# Altium PCB PCB1_1.pcbdoc
Units mil, origin at the board's own origin, x right, y up, seen from the top; angles counter-clockwise.
Board outline 4709 x 4709 mil, 2 copper layers (Top Layer, Bottom Layer); 27 components, 27 nets, 162 pads, 58 vias.
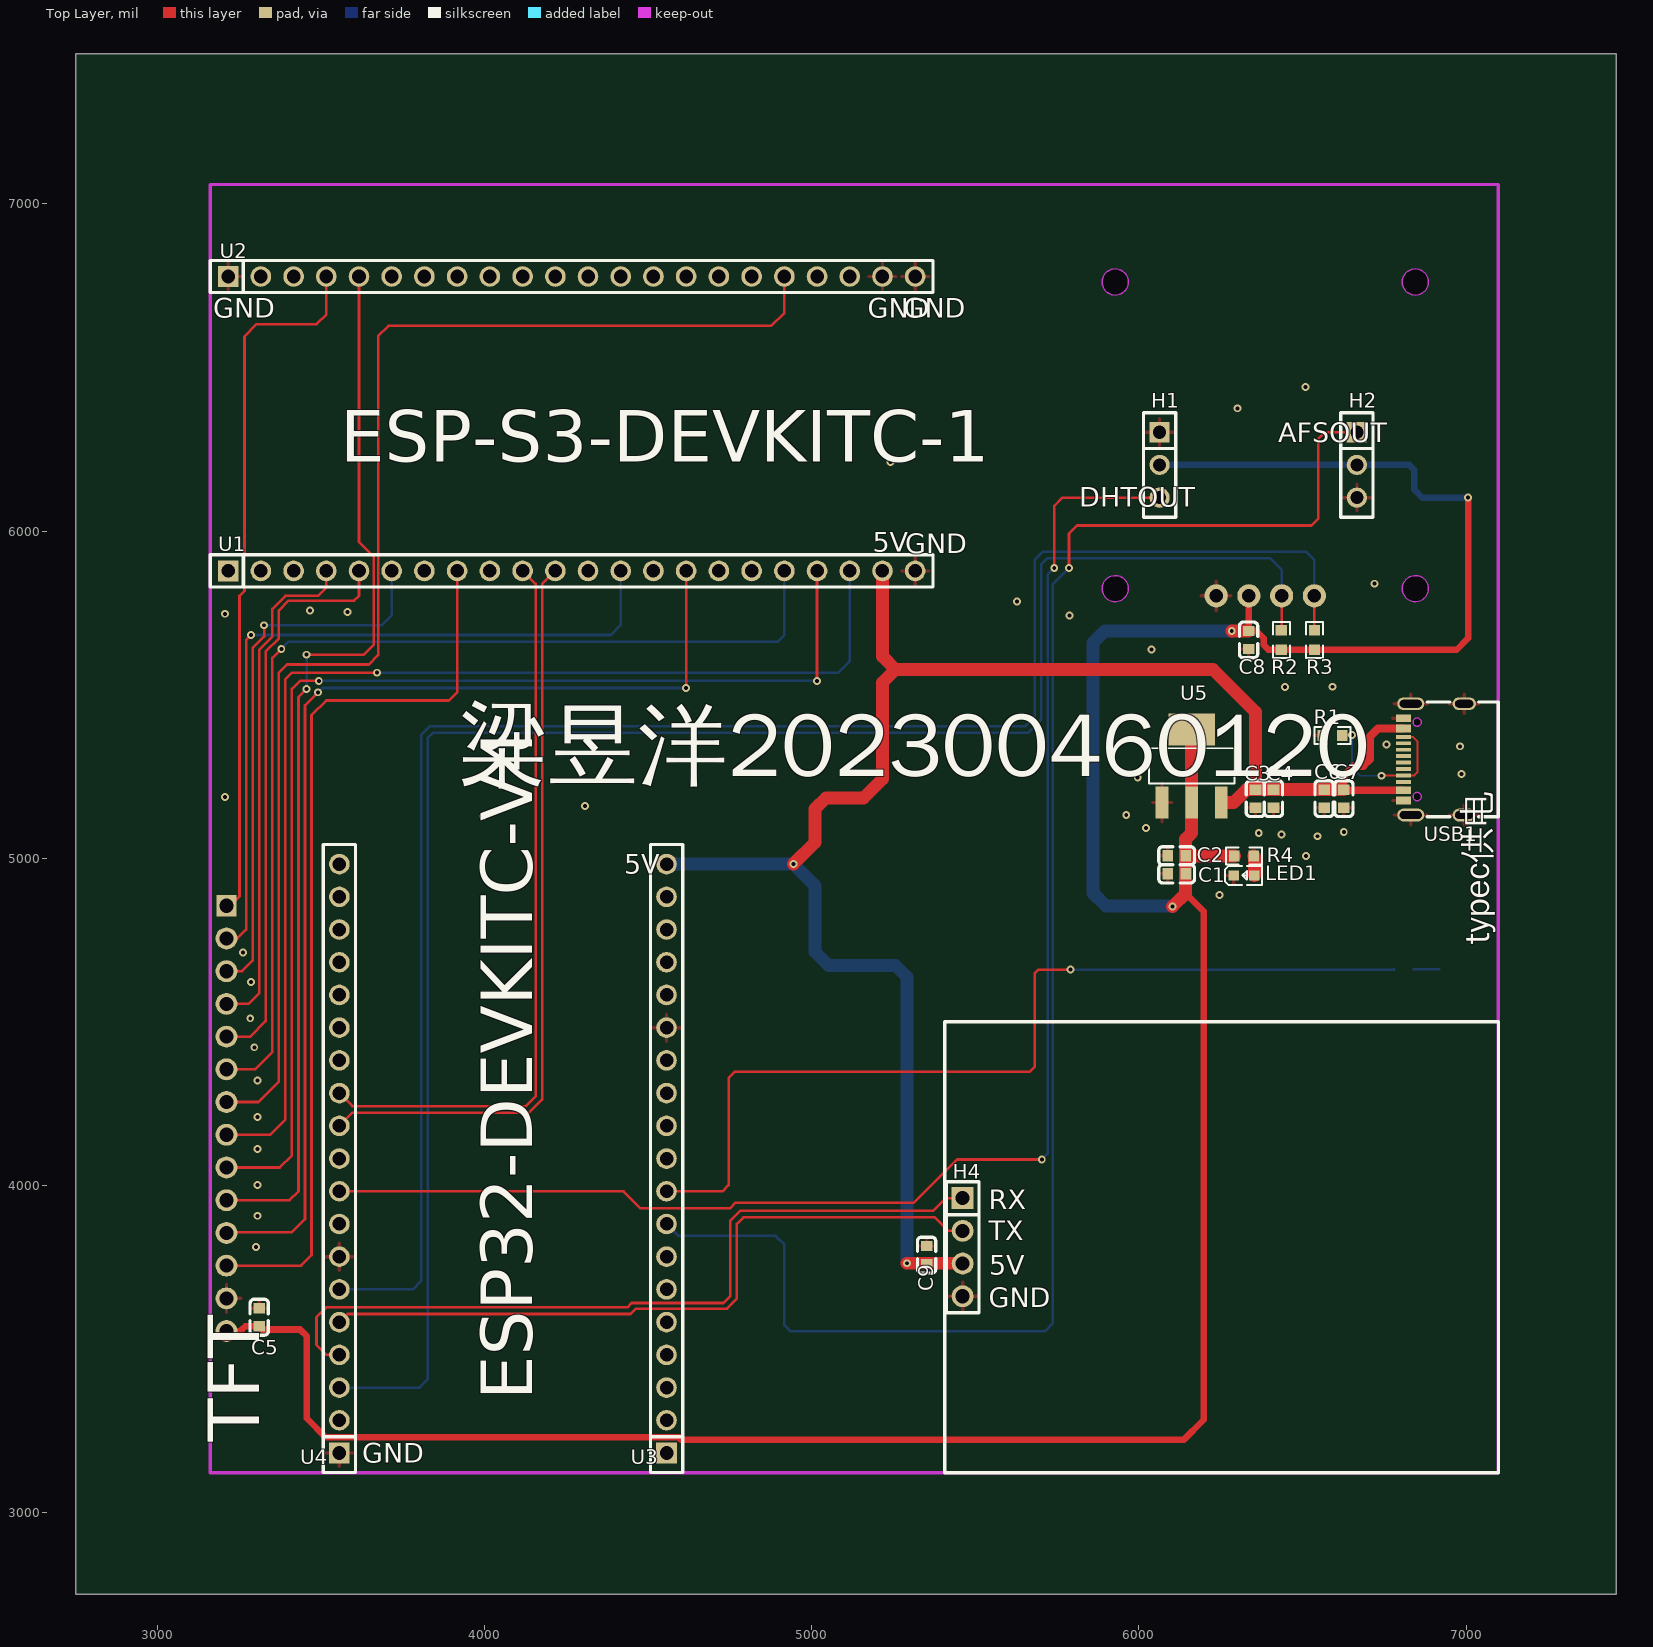
[diagram p0: Top Layer view]
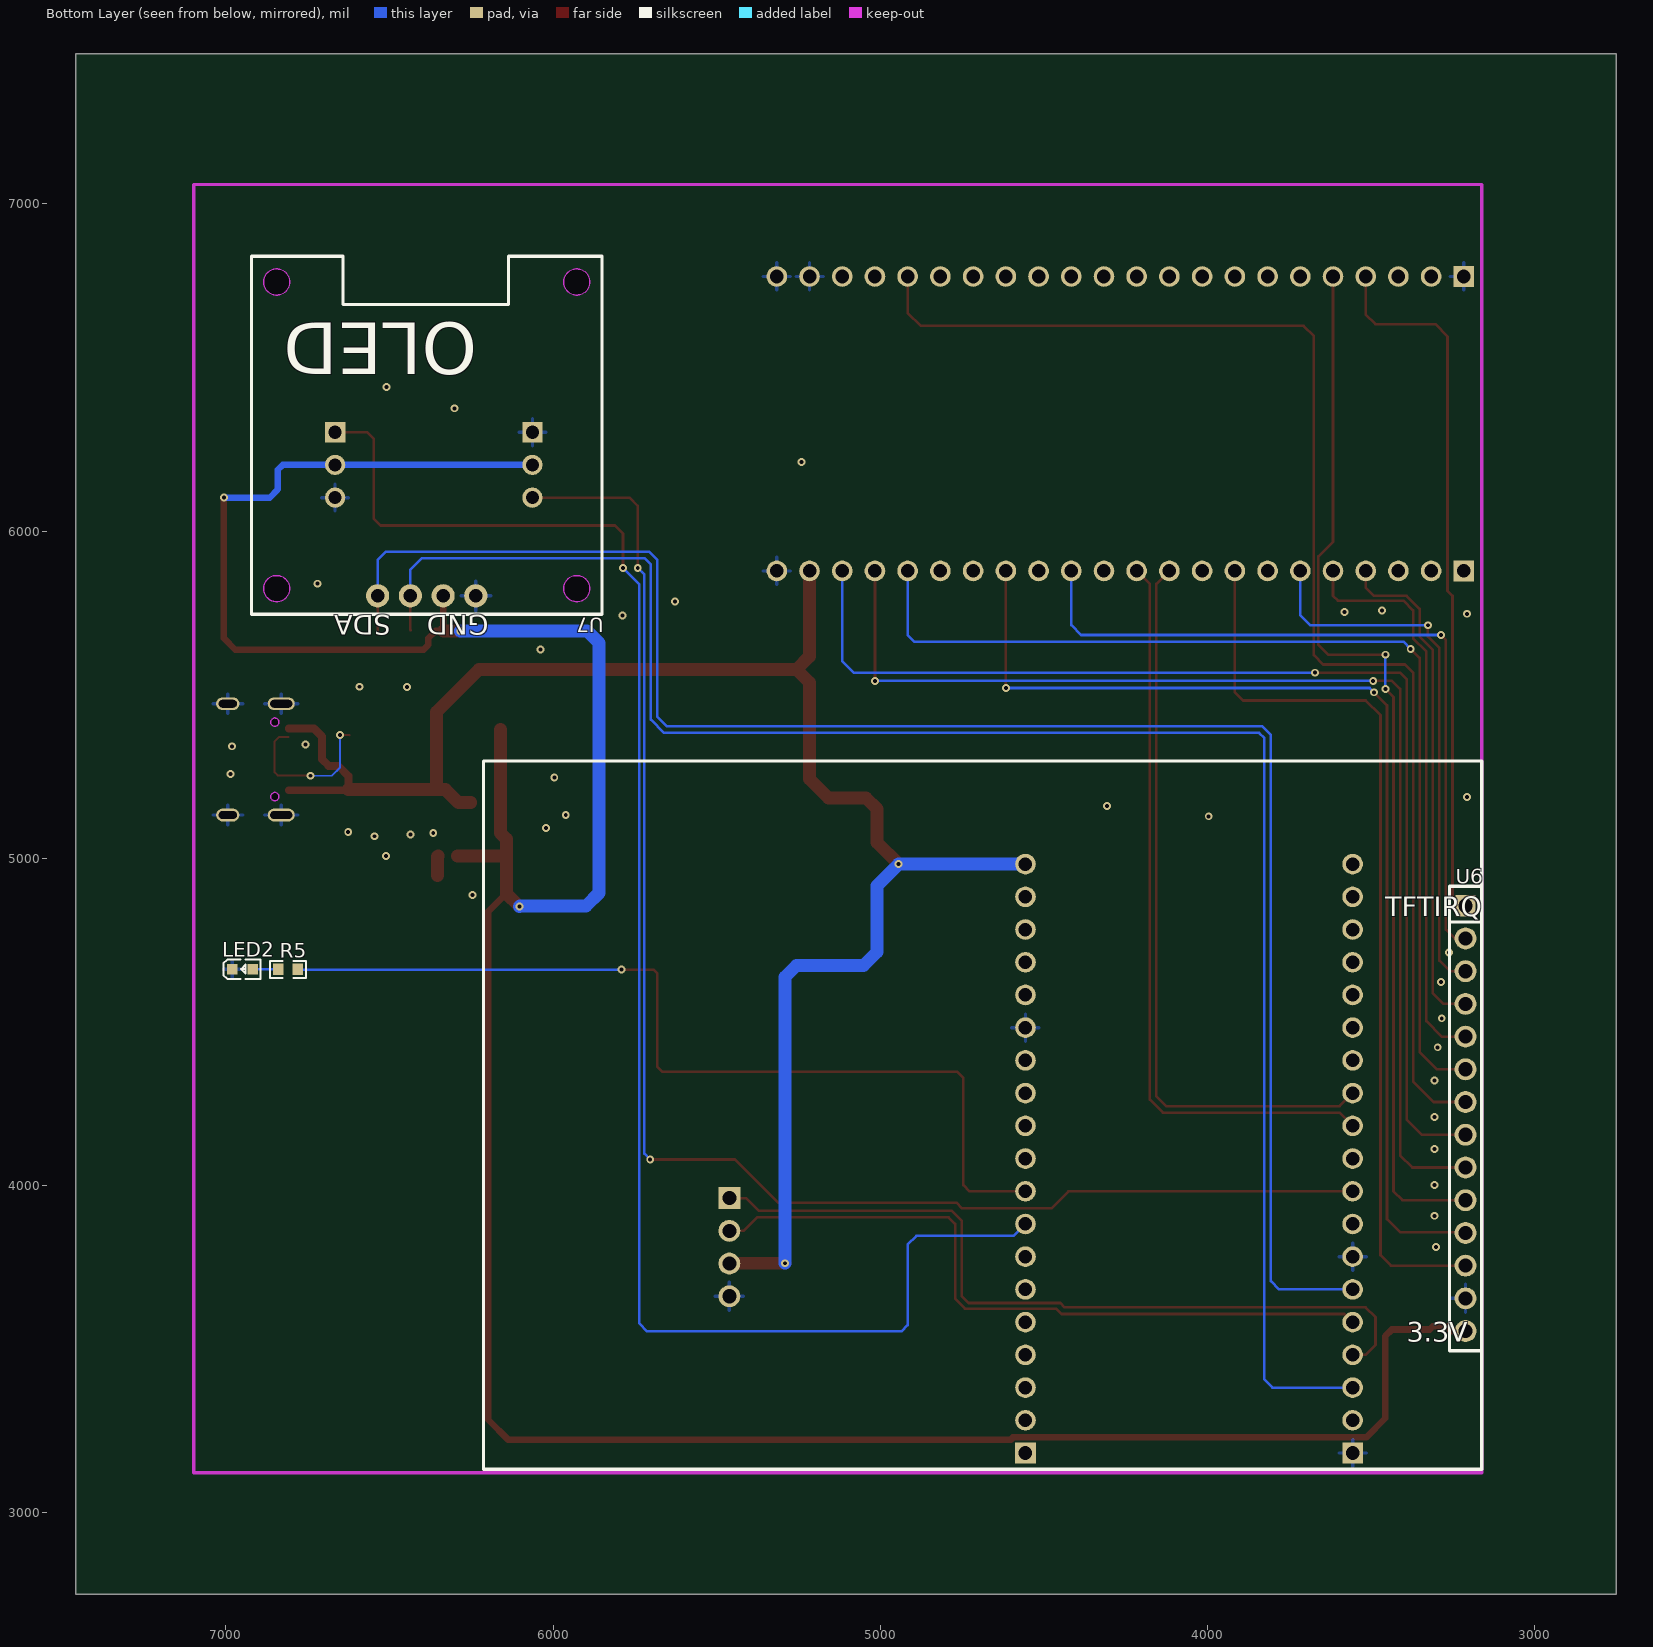
[diagram p1: Bottom Layer view, seen from below]

## Layer stack, top to bottom
Top Layer: signal copper (thickness not stored)
Dielectric: dielectric 12.6, FR-4, Dk 4.8
Bottom Layer: signal copper (thickness not stored)

## Board outline
7459,2750 2750,2750 2750,7459 7459,7459

## Design rules (kind name [scope] priority, off if disabled: settings)
BoardOutlineClearance copperThickness1oz [All] p0: genericclearance=10 ignorepadtopadclearanceinfootprint=FALSE except(0: Arc-SplitContinuation Track-SplitContinuation SMDPad-SplitContinuation THPad-SplitContinuation Via-SplitContinuation Fill-SplitContinuation Poly-SplitContinuation Region-SplitContinuation Text-SplitContinuation; 6: Track-CutoutEdge SMDPad-CutoutEdge THPad-CutoutEdge Via-CutoutEdge Region-CutoutEdge; 11.8: Track-OutlineEdge SMDPad-OutlineEdge THPad-OutlineEdge Via-OutlineEdge Fill-OutlineEdge Region-OutlineEdge Poly-OutlineEdge Text-OutlineEdge Fill-CutoutEdge)
BoardOutlineClearance copperThickness2oz [All] p0: genericclearance=10 ignorepadtopadclearanceinfootprint=FALSE except(0: Arc-SplitContinuation Track-SplitContinuation SMDPad-SplitContinuation THPad-SplitContinuation Via-SplitContinuation Fill-SplitContinuation Poly-SplitContinuation Region-SplitContinuation Text-SplitContinuation; 6: Track-CutoutEdge SMDPad-CutoutEdge THPad-CutoutEdge Via-CutoutEdge Region-CutoutEdge; 11.8: Track-OutlineEdge SMDPad-OutlineEdge THPad-OutlineEdge Via-OutlineEdge Fill-OutlineEdge Region-OutlineEdge Poly-OutlineEdge Text-OutlineEdge Fill-CutoutEdge)
Clearance copperThickness1oz [(InNet('GND') OR InNet('3.3V') OR InNet('5V') OR InNet('RX') OR InNet('TX') OR InNet('DHTOUT') OR InNet('AFSOUT') OR InNet('CC') OR InNet('OLEDSDA') OR InNet('OLEDSCL') OR InNet('RX2') OR InNet('TX2') OR InNet('TFFTCS') OR InNet('TFFTCLK') OR InNet('TFTDIN') OR InNet('TFTCS') OR InNet('TFTD0') OR InNet('TFTRST') OR InNet('TFTMISO') OR InNet('TFTMOSI') OR InNet('TFTSCK') OR InNet('TFTIRQ') OR InNet('TFTDC') OR InNet('TFTLED') OR InNet('$1N2999') OR InNet('LED') OR InNet('$1N4042'))] p1: gap=7 ignorepadtopadclearanceinfootprint=FALSE except(4: Track-Track; 6: Track-SMDPad SMDPad-SMDPad Track-THPad SMDPad-THPad THPad-THPad Track-Via SMDPad-Via THPad-Via Via-Via SMDPad-Fill THPad-Fill Via-Fill Fill-Fill Track-Region SMDPad-Region THPad-Region Via-Region Region-Region Track-Poly SMDPad-Poly THPad-Poly Via-Poly Fill-Poly Region-Poly Poly-Poly Track-Text SMDPad-Text THPad-Text Via-Text Fill-Text Region-Text Poly-Text Text-Text; 6.9: Track-Hole SMDPad-Hole THPad-Hole Via-Hole Fill-Hole Region-Hole Poly-Hole Text-Hole Sheet-Hole; 11.8: Track-Fill Fill-Region Track-Sheet SMDPad-Sheet THPad-Sheet Via-Sheet Fill-Sheet Region-Sheet Poly-Sheet Text-Sheet)
Clearance copperThickness2oz [All] p1: gap=7 ignorepadtopadclearanceinfootprint=FALSE except(6: Track-SMDPad SMDPad-SMDPad Track-THPad SMDPad-THPad THPad-THPad Track-Via SMDPad-Via THPad-Via Via-Via SMDPad-Fill THPad-Fill Via-Fill Fill-Fill Track-Region SMDPad-Region THPad-Region Via-Region Region-Region Track-Poly SMDPad-Poly THPad-Poly Via-Poly Fill-Poly Region-Poly Poly-Poly Track-Text SMDPad-Text THPad-Text Via-Text Fill-Text Region-Text Poly-Text Text-Text; 6.9: Track-Hole SMDPad-Hole THPad-Hole Via-Hole Fill-Hole Region-Hole Poly-Hole Text-Hole Sheet-Hole; 8: Track-Track; 11.8: Track-Fill Fill-Region Track-Sheet SMDPad-Sheet THPad-Sheet Via-Sheet Fill-Sheet Region-Sheet Poly-Sheet Text-Sheet)
DiffPairsRouting differentialPair [All] p1: maxuncoupledlength=10 minlimit=6 maxlimit=6 mostfreqgap=6 toplayer_minwidth=5 toplayer_prefwidth=10 toplayer_maxwidth=100 bottomlayer_minwidth=5 bottomlayer_prefwidth=10 bottomlayer_maxwidth=100
PasteMaskExpansion pasteMaskExpansion [All] p1: expansion=0
PlaneConnect innerPlane [All] p1: planeconnectstyle=Relief reliefexpansion=20 reliefentries=4 reliefconductorwidth=10 reliefairgap=10
PolygonConnect copperRegion [All] p1: connectstyle=Relief reliefentries=4 reliefconductorwidth=10 polygonreliefangle="90 Angle" airgapwidth=10
RoutingVias viaSize [All] p1: viastyle="Through Hole" holewidth=12.0078 minholewidth=11.811 maxholewidth=248.0314 width=24.0158 minwidth=19.685 maxwidth=393.7008
SolderMaskExpansion solderMaskExpansion [All] p1: useseparateexpansions=TRUE expansion=2 expansionbottom=2
Width copperThickness1oz [All] p1: maxlimit=100 minlimit=5 preferedwidth=10
Width copperThickness2oz [All] p1: maxlimit=100 minlimit=8 preferedwidth=10

## Components (designator, comment, footprint, x,y, rotation, side; value= is the part's Value field where it differs from the comment)
C1 "CL10A106KP8NNNC" C0603 6115.11,4952.19 r180 top
C2 "CC0603KRX7R9BB104" C0603 6115.11,5007.19 r180 top
C3 "CL10A106KP8NNNC" C0603 6356,5182 r90 top
C4 "CC0603KRX7R9BB104" C0603 6411,5182 r90 top
C5 "CC0603KRX7R9BB104" C0603 3311,3597 r270 top
C6 "CL10A106KP8NNNC" C0603 6566,5182 r90 top
C7 "CL10A106KP8NNNC" C0603 6626,5182 r90 top
C8 "CC0603KRX7R9BB104" C0603 6334.95,5667 r90 top
C9 "CC0603KRX7R9BB104" C0603 5351,3787 r270 top
H1 "PM254V-11-03-H85" HDR-TH_3P-P2.54-V-F 6063,6202 r270 top
H2 "PM254V-11-03-H85" HDR-TH_3P-P2.54-V-F 6666,6202 r270 top
H4 "PZ254V-11-04P" HDR-TH_4P-P2.54-V-M 5461,3810.98 r270 top
LED1 "KT-0603R" LED0603-RD 6321,4947 r0 top
LED2 "KT-0603R" LED0603-RD 6948.87,4660.41 r180 bottom
R1 "FRC0603F5101TS" R0603 6591.57,5375.53 r0 top
R2 "0603WAF4701T5E" R0603 6434.95,5667 r270 top
R3 "0603WAF4701T5E" R0603 6536,5667 r270 top
R4 "0603WAF4701T5E" R0603 6321,5007 r180 top
R5 "0603WAF1001T5E" R0603 6810.05,4660.41 r0 bottom
U1 "ZX-PM2.54-1-22PY" HDR-TH_22P-P2.54-V-F 4266,5877.91 r0 top
U2 "ZX-PM2.54-1-22PY" HDR-TH_22P-P2.54-V-F 4266,6777.91 r0 top
U3 "ZX-PM2.54-1-19PY" HDR-TH_19P-P2.54-V-F 4555.96,4082 r90 top
U4 "ZX-PM2.54-1-19PY" HDR-TH_19P-P2.54-V-F 3555.96,4082 r90 top
U5 "AMS1117-3.3_C347222" SOT-223-4_L6.5-W3.5-P2.30-LS7.0-BR 6161,5282 r270 top
U6 "PM254-1-14-Z-8.5" HDR-TH_14P-P2.54-V-F-1 3211,4204.68 r270 bottom
U7 "HS96L03W2C03" OLED-TH_L27.8-W27.2-P2.54_C9900033791 6386,5802 r0 bottom
USB1 "TYPE-C16PIN" USB-C-SMD_TYPE-C16PIN 6901,5302 r90 top

## Footprints (in the part's own frame and the unit in brackets; to place one, negate y for a bottom-side part, rotate by r counter-clockwise, add the part's x,y. Pads: shape width x height; smd on the part's side, far side on the other; paste and mask are expansions set on the pad)
C0603 [mm]
  rect 0.8x0.9 smd: 1(-0.7,0) 2(0.7,0)
  silkscreen extent -1.39,-0.71 1.39,0.71
HDR-TH_3P-P2.54-V-F [mil]
  rect 62x62 hole 40.16: 1(-100,0)
  round 62 hole 40.16: 2(0,0) 3(100,0)
  silkscreen extent -160,-49 160,49
HDR-TH_4P-P2.54-V-M [mm]
  rect 1.7x1.7 hole 1.1: 1(-3.81,0)
  round 1.7 hole 1.1: 2(-1.27,0) 3(1.27,0) 4(3.81,0)
  silkscreen extent -5.08,-1.27 5.08,1.27
HDR-TH_14P-P2.54-V-F-1 [mm]
  rect 1.7x1.575 hole 1.1: 1(-16.51,0)
  round 1.7 hole 1.1: 2(-13.97,0) 3(-11.43,0) 4(-8.89,0) 5(-6.35,0) 6(-3.81,0) 7(-1.27,0) 8(1.27,0) 9(3.81,0) 10(6.35,0) 11(8.89,0) 12(11.43,0) 13(13.97,0) 14(16.51,0)
  silkscreen extent -18.03,-1.25 18.03,1.25
HDR-TH_19P-P2.54-V-F [mm]
  rect 1.6x1.6 hole 1.05: 1(-22.86,0)
  round 1.6 hole 1.05: 2(-20.32,0) 3(-17.78,0) 4(-15.24,0) 5(-12.7,0) 6(-10.16,0) 7(-7.62,0) 8(-5.08,0) 9(-2.54,0) 10(0,0) 11(2.54,0) 12(5.08,0) 13(7.62,0) 14(10.16,0) 15(12.7,0) 16(15.24,0) 17(17.78,0) 18(20.32,0) 19(22.86,0)
  silkscreen extent -24.38,-1.25 24.38,1.25
HDR-TH_22P-P2.54-V-F [mm]
  rect 1.6x1.6 hole 1.05: 1(-26.67,0)
  round 1.6 hole 1.05: 2(-24.13,0) 3(-21.59,0) 4(-19.05,0) 5(-16.51,0) 6(-13.97,0) 7(-11.43,0) 8(-8.89,0) 9(-6.35,0) 10(-3.81,0) 11(-1.27,0) 12(1.27,0) 13(3.81,0) 14(6.35,0) 15(8.89,0) 16(11.43,0) 17(13.97,0) 18(16.51,0) 19(19.05,0) 20(21.59,0) 21(24.13,0) 22(26.67,0)
  silkscreen extent -28.06,-1.25 28.06,1.25
LED0603-RD [mm]
  rect 0.8x0.8 smd: 1(-0.799,0) 2(0.799,0)
  silkscreen extent -1.49,-0.75 1.39,0.76
OLED-TH_L27.8-W27.2-P2.54_C9900033791 [mm]
  round 1.8 hole 1.05: 1(-3.81,0) 2(-1.27,0) 3(1.27,0) 4(3.81,0)
  Board Outline Layer circle w0.005: c-11.65,-0.56 r1.016
  Board Outline Layer circle w0.005: c11.65,-0.56 r1.016
  Board Outline Layer circle w0.005: c-11.65,-24.36 r1.016
  Board Outline Layer circle w0.005: c11.65,-24.36 r1.016
  Board Outline Layer region: -10.634,-0.56 -10.735,-0.119 -11.016,0.234 -11.424,0.431 -11.876,0.431 -12.283,0.234 -12.565,-0.119 -12.666,-0.56 -12.666,-0.56 -12.565,-1.001 -12.283,-1.354 -11.876,-1.551 -11.424,-1.551 -11.016,-1.354 -10.735,-1.001 -10.634,-0.56
  Board Outline Layer region: 12.666,-0.56 12.565,-0.119 12.283,0.234 11.876,0.431 11.424,0.431 11.017,0.234 10.735,-0.119 10.634,-0.56 10.634,-0.56 10.735,-1.001 11.017,-1.354 11.424,-1.551 11.876,-1.551 12.283,-1.354 12.565,-1.001 12.666,-0.56
  Board Outline Layer region: -10.634,-24.36 -10.735,-23.919 -11.016,-23.566 -11.424,-23.369 -11.876,-23.369 -12.283,-23.566 -12.565,-23.919 -12.666,-24.36 -12.666,-24.36 -12.565,-24.801 -12.283,-25.154 -11.876,-25.35 -11.424,-25.35 -11.016,-25.154 -10.735,-24.801 -10.634,-24.36
  Board Outline Layer region: 12.666,-24.36 12.565,-23.919 12.283,-23.566 11.876,-23.369 11.424,-23.369 11.017,-23.566 10.735,-23.919 10.634,-24.36 10.634,-24.36 10.735,-24.801 11.017,-25.154 11.424,-25.35 11.876,-25.35 12.283,-25.154 12.565,-24.801 12.666,-24.36
  Multi-Layer board cut-out: -10.634,-0.56 -10.735,-0.119 -11.016,0.234 -11.424,0.431 -11.876,0.431 -12.283,0.234 -12.565,-0.119 -12.666,-0.56 -12.666,-0.56 -12.565,-1.001 -12.283,-1.354 -11.876,-1.551 -11.424,-1.551 -11.016,-1.354 -10.735,-1.001 -10.634,-0.56
  Multi-Layer board cut-out: 12.666,-0.56 12.565,-0.119 12.283,0.234 11.876,0.431 11.424,0.431 11.017,0.234 10.735,-0.119 10.634,-0.56 10.634,-0.56 10.735,-1.001 11.017,-1.354 11.424,-1.551 11.876,-1.551 12.283,-1.354 12.565,-1.001 12.666,-0.56
  Multi-Layer board cut-out: -10.634,-24.36 -10.735,-23.919 -11.016,-23.566 -11.424,-23.369 -11.876,-23.369 -12.283,-23.566 -12.565,-23.919 -12.666,-24.36 -12.666,-24.36 -12.565,-24.801 -12.283,-25.154 -11.876,-25.35 -11.424,-25.35 -11.016,-25.154 -10.735,-24.801 -10.634,-24.36
  Multi-Layer board cut-out: 12.666,-24.36 12.565,-23.919 12.283,-23.566 11.876,-23.369 11.424,-23.369 11.017,-23.566 10.735,-23.919 10.634,-24.36 10.634,-24.36 10.735,-24.801 11.017,-25.154 11.424,-25.35 11.876,-25.35 12.283,-25.154 12.565,-24.801 12.666,-24.36
  silkscreen extent -13.6,-26.36 13.6,1.44
R0603 [mil]
  rect 31.75x34.02 smd: 1(-29.66,0) 2(29.66,0)
  silkscreen extent -55,-26 55,26
SOT-223-4_L6.5-W3.5-P2.30-LS7.0-BR [mm]
  rect 2.47x0.98 smd: 1(2.835,-2.3) 2(2.835,0) 3(2.835,2.3)
  rect 2.47x3.6 smd: 4(-2.835,0)
  silkscreen extent -1.37,-3.33 1.37,3.33
USB-C-SMD_TYPE-C16PIN [mm]
  oval 1x2.1 hole 0.6 slot 1.7 at 90 deg: 1(-4.32,1.787) 2(4.32,1.787)
  oval 1x1.8 hole 0.6 slot 1.4 at 90 deg: 3(-4.32,-2.362) 4(4.32,-2.362)
  rect 0.6x1.15 smd: A1B12(-3.2,2.362) A4B9(-2.4,2.362) B1A12(3.2,2.362) B4A9(2.4,2.362)
  rect 0.3x1.15 smd: A5(-1.25,2.362) A6(-0.25,2.362) A7(0.25,2.362) A8(1.25,2.362) B5(1.75,2.362) B6(0.75,2.362) B7(-0.75,2.362) B8(-1.75,2.362)
  Board Outline Layer circle w0.005: c2.89,1.288 r0.325
  Board Outline Layer circle w0.005: c-2.89,1.288 r0.325
  Board Outline Layer region: 2.89,0.963 2.749,0.995 2.636,1.085 2.573,1.216 2.573,1.36 2.636,1.491 2.749,1.581 2.89,1.613 2.89,1.613 3.031,1.581 3.144,1.491 3.207,1.36 3.207,1.216 3.144,1.085 3.031,0.995 2.89,0.963
  Board Outline Layer region: -2.89,0.963 -3.031,0.995 -3.144,1.085 -3.207,1.216 -3.207,1.36 -3.144,1.491 -3.031,1.581 -2.89,1.613 -2.89,1.613 -2.749,1.581 -2.636,1.491 -2.573,1.36 -2.573,1.216 -2.636,1.085 -2.749,0.995 -2.89,0.963
  Multi-Layer board cut-out: 2.89,0.963 2.749,0.995 2.636,1.085 2.573,1.216 2.573,1.36 2.636,1.491 2.749,1.581 2.89,1.613 2.89,1.613 3.031,1.581 3.144,1.491 3.207,1.36 3.207,1.216 3.144,1.085 3.031,0.995 2.89,0.963
  Multi-Layer board cut-out: -2.89,0.963 -3.031,0.995 -3.144,1.085 -3.207,1.216 -3.207,1.36 -3.144,1.491 -3.031,1.581 -2.89,1.613 -2.89,1.613 -2.749,1.581 -2.636,1.491 -2.573,1.36 -2.573,1.216 -2.636,1.085 -2.749,0.995 -2.89,0.963
  silkscreen extent -4.45,-5 4.45,0.52

## Via types
v1: diameter 24.02, hole 12.01, Top Layer to Bottom Layer, 58 vias

## Nets (pads, with @x,y where several pads share a name; then routed paths per layer and width w, separated by ;. In a path a pad name is that pad's centre, name@x,y a point inside that pad or via, vN(x,y) a via of type N, cw(c..) or ccw(c..) an arc to the next point about the centre after c; other vN are vias at no path point)
3.3V: C1.1 C2.1 C5.2 C8.2 H1.2 H2.2 R2.2 R3.2 R4.2 U5.2 U5.4 U6.14 U7.2 | length 9449.6
  Top Layer w20: U6.14 3253.68,3554.68 3268.44,3569.44 C5.2 3321,3559.44 3436,3559.44 3456,3539.44 3456,3288 3514.52,3229.48 4594.08,3229.48 4601.56,3222 6136,3222 6197.67,3283.67 6197.67,4837 6142.67,4892 ; U7.2 6334.95,5800.95 C8.2 6358.44,5694.56 6381,5672 6381,5652 6395.66,5637.34 R2.2 R3.2 6971.34,5637.34 7006,5672 v1(7006,6102)
  Top Layer w39.37: v1(6102.67,4852) 6142.67,4892 C1.1 C2.1 ; U5.4 U5.2 6161,5077 6142.67,5058.67 C2.1 ; R4.2 6291.15,5007.19 C2.1
  Top Layer w39.4: v1(6283.56,5694.56) C8.2
  Bottom Layer w20: H1.2 H2.2 6826,6202 6841,6187 6841,6127 6866,6102 v1(7006,6102)
  Bottom Layer w39.4: v1(6102.67,4852) 6100.67,4854 5899,4854 5859,4894 5859,5658 5895.56,5694.56 v1(6283.56,5694.56)
5V: C3.2 C4.2 C6.2 C7.2 C9.2 H4.3 U1.21 U3.19 U5.3 USB1.A4B9 USB1.B4A9 | length 5443.9
  Top Layer w23.62: C6.2 C6.2@6568.05,5207.51 ; C7.2@6624.95,5209.56 6624.95,5250.95 6656,5282 6686,5282 6706,5302 6706,5372 6730.49,5396.49 USB1.B4A9 ; C7.2@6626,5207.51 USB1.A4B9
  Top Layer w39.37: v1(4943.57,4982) 5009.74,5048.17 5009.74,5150.74 5043.16,5184.16 5158.16,5184.16 5216,5242 5216,5537 5256,5577 ; U1.21 5216,5617 5256,5577 ; v1(5291,3762) 5459.98,3762 H4.3 ; U5.3 6289.39,5170.39 6328.56,5209.56 C3.2 ; C7.2 6624.95,5209.56 C6.2 C4.2 C3.2 ; 5256,5577 6226,5577 6356,5447 C3.2
  Bottom Layer w39.37: U3.19 v1(4943.57,4982) 5009.74,4915.83 5009.74,4713.26 5051,4672 5256,4672 5291,4637 v1(5291,3762)
$1N2999: LED1.2 R4.1 | length 60.7
  Top Layer w39.37: R4.1 6352.48,5005.19 LED1.2
$1N4042: LED2.2 R5.2 | length 77.7
  Bottom Layer w8: R5.2 LED2.2
AFSOUT: H2.1 U3.8 | length 5056
  Top Layer w8: v1(5786,5887) 5786,5992 5811,6017 6527,6017 6548,6038 6548,6282 6568,6302 H2.1
  Bottom Layer w8: U3.8 4591.96,3846 4889.05,3846 4916,3819.05 4916,3573 4935,3554 5711.99,3554 5736,3578.01 5736,5837 v1(5786,5887)
CC: R1.2 USB1.A5 USB1.B5 | length 488.6
  Top Layer w6: R1.2 6622.71,5377 v1(6651,5377) ; v1(6741,5252) 6741.79,5252.79 USB1.A5 6841.79,5252.79 6851,5262 6851,5357 6837.1,5370.9 USB1.B5
  Bottom Layer w6: v1(6651,5377) 6651,5277 6676,5252 v1(6741,5252)
DHTOUT: H1.3 U4.9 | length 4576.4
  Top Layer w8: U4.9 4425,3982 4477,3930 4750,3930 4767,3947 5312,3947 5444,4079 v1(5703,4079) ; v1(5741,5887) 5741,6077 5766,6102 H1.3
  Bottom Layer w8: v1(5703,4079) 5721,4097 5721,5867 v1(5741,5887)
GND: C1.2 C2.2 C3.1 C4.1 C5.1 C6.1 C7.1 C8.1 C9.1 H1.1 H2.3 H4.4 LED1.1 LED2.1 R1.1 U1.22 U2.1 U2.21 U2.22 U3.14 U4.1 U4.7 U5.1 U6.13 U7.1 USB1.1 USB1.2 USB1.3 USB1.4 USB1.A1B12 USB1.B1A12
  other v1: 3301,3812 3306,3907 3306,4001.43 3306,4110.81 3306,4208.53 3306,4320.6 3296,4422 3283.68,4510.67 3286,4622 3261,4712 6246,4887 6509.94,5007 6546,5067 6436,5072 6366,5077 6626,5079.71 6021,5092 3996,5128 5961,5132 4307,5160 3206,5187 5996,5247 6986,5257 6981,5342 6756,5347 6446,5523 6591,5524 6038,5638 5788,5742 3206,5747 3581,5752 3466,5757 5627,5785 6720,5839 5240,6211 6301,6375 6509,6440
LED: R5.1 U3.9 | length 2865.1
  Top Layer w8: U3.9 4727,3982 4745.63,4000.63 4745.63,4328.63 4764,4347 5666,4347 5681,4362 5681,4648 5692.41,4659.41 v1(5791,4659.41)
  Bottom Layer w8: v1(5791,4659.41) 6779.39,4659.41 R5.1
OLEDSCL: R2.1 U4.3 U7.3 | length 5555.7
  Top Layer w8: R2.1 6436,5697.71 U7.3
  Bottom Layer w8: U4.3 3801,3382 3826,3407 3826,5367 3841.86,5382.86 5660.14,5382.86 5701,5423.72 5701,5897 5721,5917 6401,5917 6436,5882 U7.3
OLEDSDA: R3.1 U4.6 U7.4 | length 5398.6
  Top Layer w8: R3.1 U7.4
  Bottom Layer w8: U4.6 3781,3682 3806,3707 3806,5377 3831.86,5402.86 5651.86,5402.86 5681,5432 5681,5910.94 5707.06,5937 6511,5937 6536,5912 U7.4
RX: H4.1 U4.4 | length 2427.9
  Top Layer w8: U4.4 3516,3482 3486,3512 3486,3597 3516,3627 4436,3627 4449.52,3640.52 4729.52,3640.52 4751,3662 4751,3892 4781,3922 5371,3922 5409.98,3960.98 H4.1
RX2: U1.10 U4.12 | length 2251.5
  Top Layer w8: U4.12 3595.96,4242 4126,4242 4156,4272 4156,5837.91 U1.10
TFFTCLK: U1.5 U6.5 | length 1750.7
  Top Layer w8: U6.5 3283.68,4454.68 3331,4502 3331,5632 3371,5672 3371,5757 3401,5787 3601,5787 3616,5802 U1.5
TFFTCS: U1.4 U6.4 | length 1547.8
  Top Layer w8: U6.4 3278.68,4554.68 3311,4587 3311,5637 3351,5677 3351,5762 3391,5802 3491,5802 3516,5827 U1.4
TFTCS: U1.8 U6.12 | length 2768.3
  Top Layer w8: U6.12 3438.68,3754.68 3471,3787 3471,5437 3516,5482 3891,5482 3916,5507 U1.8
TFTD0: U1.13 U6.2 | length 2285.9
  Top Layer w8: U6.2 3243.68,4754.68 3271,4782 3271,5667 v1(3286,5682)
  Bottom Layer w8: v1(3286,5682) 4386,5682 4416,5712 U1.13
TFTDC: U2.5 U6.10 | length 3243.6
  Top Layer w8: U6.10 3403.68,3954.68 3431,3982 3431,5492 v1(3456,5517) ; v1(3456,5622) 3631,5622 3661,5652 3661,5922 3616,5967 U2.5
  Bottom Layer w8: v1(3456,5517) v1(3456,5622)
TFTDIN: U1.6 U6.3 | length 1671.2
  Top Layer w8: U6.3 3258.68,4654.68 3291,4687 3291,5642 3326,5677 v1(3326,5712)
  Bottom Layer w8: v1(3326,5712) 3686,5712 3716,5742 U1.6
TFTIRQ: U2.4 U6.1 | length 2163.2
  Top Layer w8: U6.1 3222.31,4854.68 3250.64,4883 3250.64,5801.64 3266,5817 3266,6594.63 3303.37,6632 3486,6632 3516,6662 U2.4
TFTLED: U2.18 U6.7 | length 4118.5
  Top Layer w8: U6.7 3308.68,4254.68 3371,4317 3371,5567 3396,5592 3646,5592 3674.52,5620.52 3674.52,6595.52 3706,6627 4876,6627 4916,6667 U2.18
TFTMISO: U1.18 U6.6 | length 3156.6
  Top Layer w8: U6.6 3298.68,4354.68 3351,4407 3351,5612 v1(3378.5,5639.5)
  Bottom Layer w8: v1(3378.5,5639.5) 3401,5662 4896,5662 4916,5682 U1.18
TFTMOSI: U1.19 U6.9 | length 3591.7
  Top Layer w8: U6.9 3373.68,4054.68 3411,4092 3411,5517 3436,5542 v1(3493.18,5542) ; v1(5016,5542) U1.19
  Bottom Layer w8: v1(3493.18,5542) v1(5016,5542)
TFTRST: U1.15 U6.11 | length 3372.4
  Top Layer w8: U6.11 3213.32,3857 3411,3857 3451,3897 3451,5467 v1(3491,5507) ; v1(4616,5520.01) U1.15
  Bottom Layer w8: v1(3491,5507) 3504.01,5520.01 v1(4616,5520.01)
TFTSCK: U1.20 U6.8 | length 3568.3
  Top Layer w8: U6.8 3343.68,4154.68 3391,4202 3391,5547 3411,5567 v1(3671,5567)
  Bottom Layer w8: v1(3671,5567) 5081,5567 5116,5602 U1.20
TX: H4.2 U4.5 | length 2188.4
  Top Layer w8: U4.5 3580.96,3607 4446,3607 4462.48,3623.48 4741,3623.48 4771,3653.48 4771,3882 4791,3902 5376,3902 5417.02,3860.98 H4.2
TX2: U1.11 U4.11 | length 2285.7
  Top Layer w8: U4.11 3595.96,4222 4136,4222 4176,4262 4176,5837.91 U1.11
pads on no net: U1.1 U1.2 U1.3 U1.7 U1.9 U1.12 U1.14 U1.16 U1.17 U2.2 U2.3 U2.6 U2.7 U2.8 U2.9 U2.10 U2.11 U2.12 U2.13 U2.14 U2.15 U2.16 U2.17 U2.19 U2.20 U3.1 U3.2 U3.3 U3.4 U3.5 U3.6 U3.7 U3.10 U3.11 U3.12 U3.13 U3.15 U3.16 U3.17 U3.18 U4.2 U4.8 U4.10 U4.13 U4.14 U4.15 U4.16 U4.17 U4.18 U4.19 USB1.A6 USB1.A7 USB1.A8 USB1.B6 USB1.B7 USB1.B8

## Polygon pours and split planes (outlines as drawn)
GND on Bottom Layer (solid, remove dead copper, pour order 2): 3000,7209 7209,7209 7209,3000 3000,3000
GND on Top Layer (solid, remove dead copper, pour order 0): 3007,7135 7182,7135 7182,3014 3007,3014

## Keep-outs
Board Outline Layer:
  lines w10: 3161,3122 3161,7059.01 7098.01,7059.01 7098.01,3122 3161,3122

## Silkscreen, mask and mechanical layers (free items; w line width, h text height)
Top Silkscreen Layer:
  lines w10: 5406,3122 7098.91,3122 7098.91,4499.95 5406,4499.95 5406,3122
  text "GND" at 3171,6652 h60
  text "GND" at 5171,6652 h60
  text "GND" at 5281,6652 h60
  text "AFSOUT" at 6426,6272 h60
  text "ESP-S3-DEVKITC-1" at 3558,6211 h157.48
  text "DHTOUT" at 5817,6074 h60
  text "5V" at 5186,5937 h60
  text "GND" at 5286,5932 h60
  text "梁昱洋202300460120" at 3922,5251 h200
  text "5V" at 4426,4952 h60
  text "typec供电" at 7071,4737 h78.74 r90
  text "RX" at 5540.64,3927 h60
  text "TX" at 5540.64,3832 h60
  text "5V" at 5542.09,3727 h60
  text "GND" at 5541,3627 h60
  text "ESP32-DEVKITC-V4" at 4145,3344 h157.48 r90
  text "TFT" at 3311,3217 h157.48 r90
  text "GND" at 3626,3152 h60
Bottom Silkscreen Layer:
  lines w10: 3161,3132 6212.18,3132 6212.18,5297.35 3161,5297.35 3161,3132
  text "OLED" at 6231,6637 h157.48 r180
  text "GND" at 6196,5742 h60 r180
  text "SDA" at 6496,5742 h60 r180
  text "TFTIRQ" at 3456,4822 h60
  text "3.3V" at 3391,3522 h60